# EAGLE board simple_record (EAGLE 6.6.0)
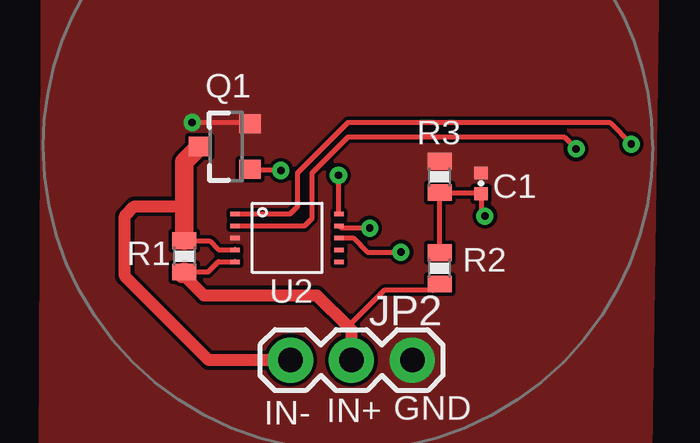
[diagram p0: board, top side]
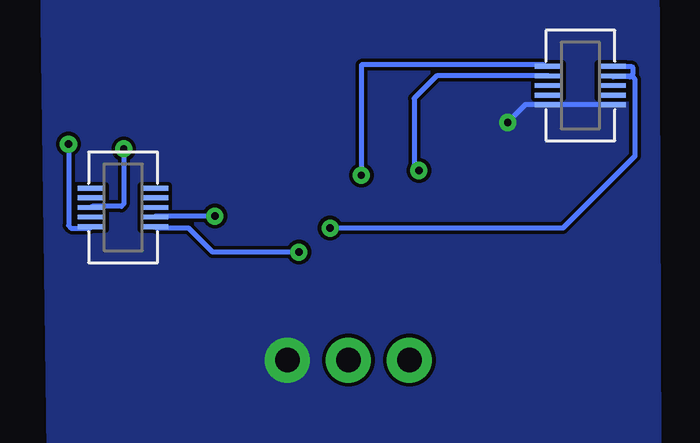
[diagram p1: board, bottom side, seen from below]

No outline drawn. Coordinates in mm, seen from the top.
Copper layers (1*16): Top 0.0178mm / dielectric 59mil / Bottom 0.0178mm
Design rules "sunstone-2lyr_v1.0.0.3": minimum track width 6mil, minimum drill 14mil, track to track 6mil, track to pad 6mil, pad to pad 6mil, via to via 6mil, smd to smd 6mil, copper to edge 20mil, drill to drill 16mil, minimum pad ring 8mil, minimum via ring 8mil, stop-mask expansion 3mil, vias tented up to drill 50mil, thermal gap 10mil

## Footprints (pad centres in the part's own frame; a part is rotated, then mirrored left to right if it is on the bottom)
0402_CAP = smd 0.536 x 0.546: 1 -0.433,0; 2 0.433,0
SQUALL_HEADER = smd 1.14 x 0.2 bottom: A1 -10.845,3.34; A2 -8.205,3.34; A3 -10.845,2.94; A4 -8.205,2.94; A5 -10.845,2.54; A6 -8.205,2.54; A7 -10.845,2.14; A8 -8.205,2.14; A9 -10.845,1.74; A10 -8.205,1.74; B1 8.205,-1.74; B2 10.845,-1.74; B3 8.205,-2.14; B4 10.845,-2.14; B5 8.205,-2.54; B6 10.845,-2.54; B7 8.205,-2.94; B8 10.845,-2.94; B9 8.205,-3.34; B10 10.845,-3.34
1X03 = drill 1.016 pad 1.88: 1 0,0; 2 2.54,0; 3 5.08,0
SOT23-3 = smd 0.8 x 0.9: 1 -0.95,-1; 2 0.95,-1; 3 0,1.1
0603-RES = smd 0.7 x 1: 1 -0.65,0; 2 0.65,0
UMAX10 = smd 0.2 x 0.4: 1 -1,-2.17; 2 -0.5,-2.17; 3 0,-2.17; 4 0.5,-2.17; 5 1,-2.17; 6 1,2.17; 7 0.5,2.17; 8 0,2.17; 9 -0.5,2.17; 10 -1,2.17

## Placement (x,y rotation side)
C1  10uF  [0402_CAP]  18.24,11.16 90 top
J1  SQUALL_HEADER  [SQUALL_HEADER]  12.7,12.7 0 top
JP2  [1X03]  10.3,3.8 0 top
Q1  MOSFET-NCHANNELSMD  [SOT23-3]  7.62,12.7 90 top
R1  0.12  [0603-RES]  5.88,8.12 270 top
R2  100K  [0603-RES]  16.51,7.62 270 top
R3  100K  [0603-RES]  16.51,11.43 270 top
U2  MAX9939  [UMAX10]  10.16,8.89 270 top

## Library data of the parts
C1 R1-R3 = passives
J1 = squall; DIGIKEY: H11617CT-ND
JP2 = SparkFun-Connectors
Q1 = fets
U2 = chips; DIGIKEY: MAX9939AUB+-ND

## Nets
CURRENT_SWITCH: J1.A4 Q1.1
GND: C1.2 J1.A9 J1.A10 JP2.3 Q1.2 R3.1 U2.3
INA-: JP2.1 Q1.3 R1.1 U2.4
MISO: J1.B8
MOSI: J1.B6 U2.2
PGA_CS: J1.A2 U2.10
PGA_OUT: J1.B9 U2.8
PV+: JP2.2 R1.2 R2.2 U2.5
SCLK: J1.B10 U2.1
VCC: J1.A1 J1.A3 U2.9
VOUT: C1.1 J1.B7 R2.1 R3.2

## Tracks (layer width: path | path; a pad name or v marks a point on that pad's centre or on a via)
CURRENT_SWITCH  (via drill 0.3)
  Top 0.203: v9.9,11.7 8.67,11.7 Q1.1
  Bottom 0.203: J1.A4 9.16,15.64 10.1,14.7 10.1,11.9 v9.9,11.7
GND  (via drill 0.3)
  Top 0.203: v6.2,13.7 8.57,13.7 Q1.2
  Bottom 0.203: J1.A9 J1.A10 5.46,14.44 v6.2,13.7
  pour Top (no thermals): 0,21.2 -0.1,-0.2 25.3,0 25.6,21
  pour Bottom (no thermals): 0,21.2 -0.1,-0.2 25.3,0 25.6,21
INA-
  Top 0.203: R1.1 6.93,8.77 7.3,8.4 U2.4
  Top 0.508: JP2.1 6.9,3.8 3.4,7.3 3.4,9.8 3.8,10.2 5.68,10.2 5.88,10
  Top 0.762: R1.1 5.88,10 5.88,12.06 Q1.3
MOSI  (via drill 0.3)
  Top 0.203: U2.2 10.89,9.39 11.2,9.7 11.2,11.6 12.7,13.1 21.7,13.1 v22.2,12.6
  Bottom 0.203: v22.2,12.6 22.2,10.3 22.3,10.2 23.5,10.2 J1.B6
PGA_CS  (via drill 0.3)
  Top 0.203: v12.3,11.5 12.3,9.92 U2.10
  Bottom 0.203: J1.A2 arc60 4.7,16.1 12.3,16.1 v12.3,11.5
PGA_OUT  (via drill 0.3)
  Top 0.203: U2.8 12.91,8.89 13.5,8.3 v14.9,8.3
  Bottom 0.203: v14.9,8.3 18.5,8.3 19.5,9.3 20.84,9.3 J1.B9
PV+
  Top 0.203: R1.2 6.87,7.47 7.3,7.9 U2.5 | R2.2 16.24,6.7 14.2,6.7 12.7,5.2
  Top 0.508: 5.8,7.39 6.69,6.5 11.4,6.5 12.7,5.2 12.84,5.06 JP2.2
  Top 0.762: 5.8,7.39 R1.2
SCLK  (via drill 0.3)
  Top 0.203: U2.1 10.29,9.89 10.6,10.2 10.6,11.6 12.7,13.7 23.6,13.7 v24.5,12.8
  Bottom 0.203: v24.5,12.8 24.5,9.4 24.4,9.3 23.61,9.3 J1.B10
VCC  (via drill 0.3)
  Top 0.203: v13.6,9.3 12.42,9.3 U2.9
  Bottom 0.203: J1.A1 1.04,16.04 1,16 1,15.7 1.1,15.6 1.81,15.6 J1.A3 1.04,15.64 0.9,15.5 0.9,12.3 3.9,9.3 v13.6,9.3
VOUT  (via drill 0.3)
  Top 0.203: R2.1 R3.2 18.19,10.78 C1.1 18.24,9.96 v18.4,9.8
  Bottom 0.203: v18.4,9.8 20.86,9.8 J1.B7

## Text on the board
tPlace: IN- | IN+ | GND